# EAGLE board sockets_pac (EAGLE 3.55)

No outline drawn. Coordinates in mm, seen from the top.
Copper layers used: 

## Footprints (pad centres in the part's own frame; a part is rotated, then mirrored left to right if it is on the bottom)
SDIP42 = smd 0.127 x 0.127 rotated 97 bottom:  0,0.635
SDIP64 = smd 0.127 x 0.127 rotated 97 bottom:  0,0.635

## Placement (x,y rotation side)
F-SDIP42  [SDIP42]  30.48,189.23 0 top
F-SDIP64  [SDIP64]  22.86,223.52 0 top
SOCKETS  SOCKETS  [-35SC]  0,0 0 top

## Library data of the parts
F-SDIP42 F-SDIP64 = SOCKETS
SOCKETS = lbr_doc